# Altium PCB PCB1.PcbDoc
Units mil, origin at the board's own origin, x right, y up, seen from the top; angles counter-clockwise.
Board outline 5000 x 2185 mil, 2 copper layers (Top Layer, Bottom Layer); 67 components, 117 nets, 252 pads, 0 vias.
Unrouted connection lines stored in the file: 171.
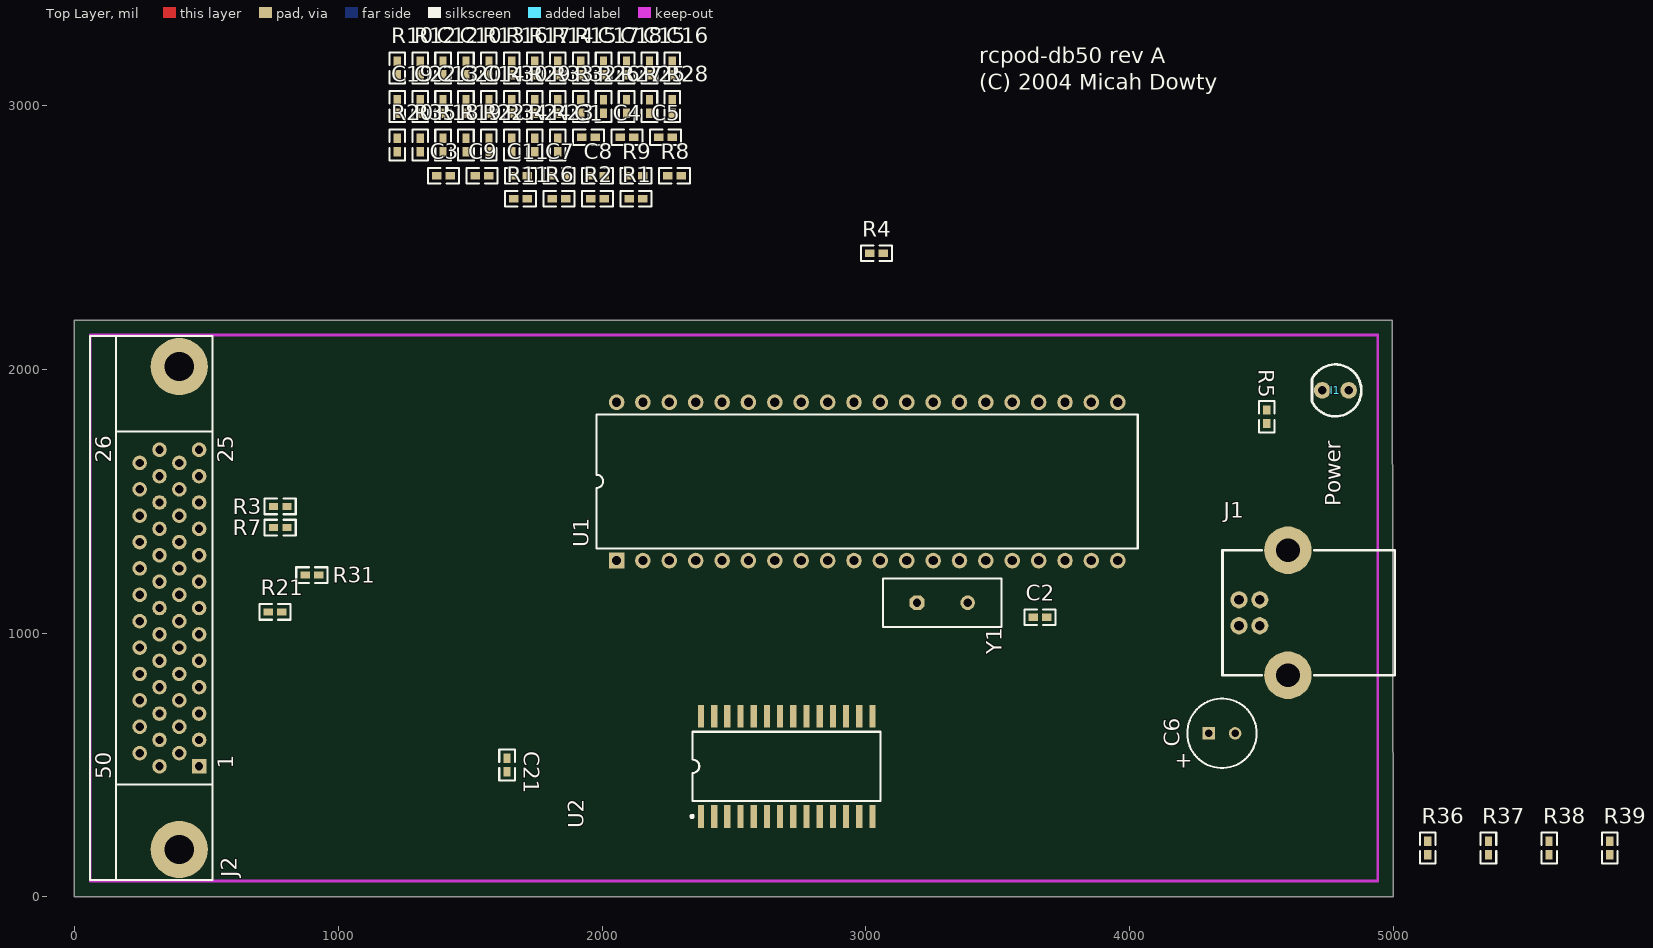
[diagram p0: Top Layer view]
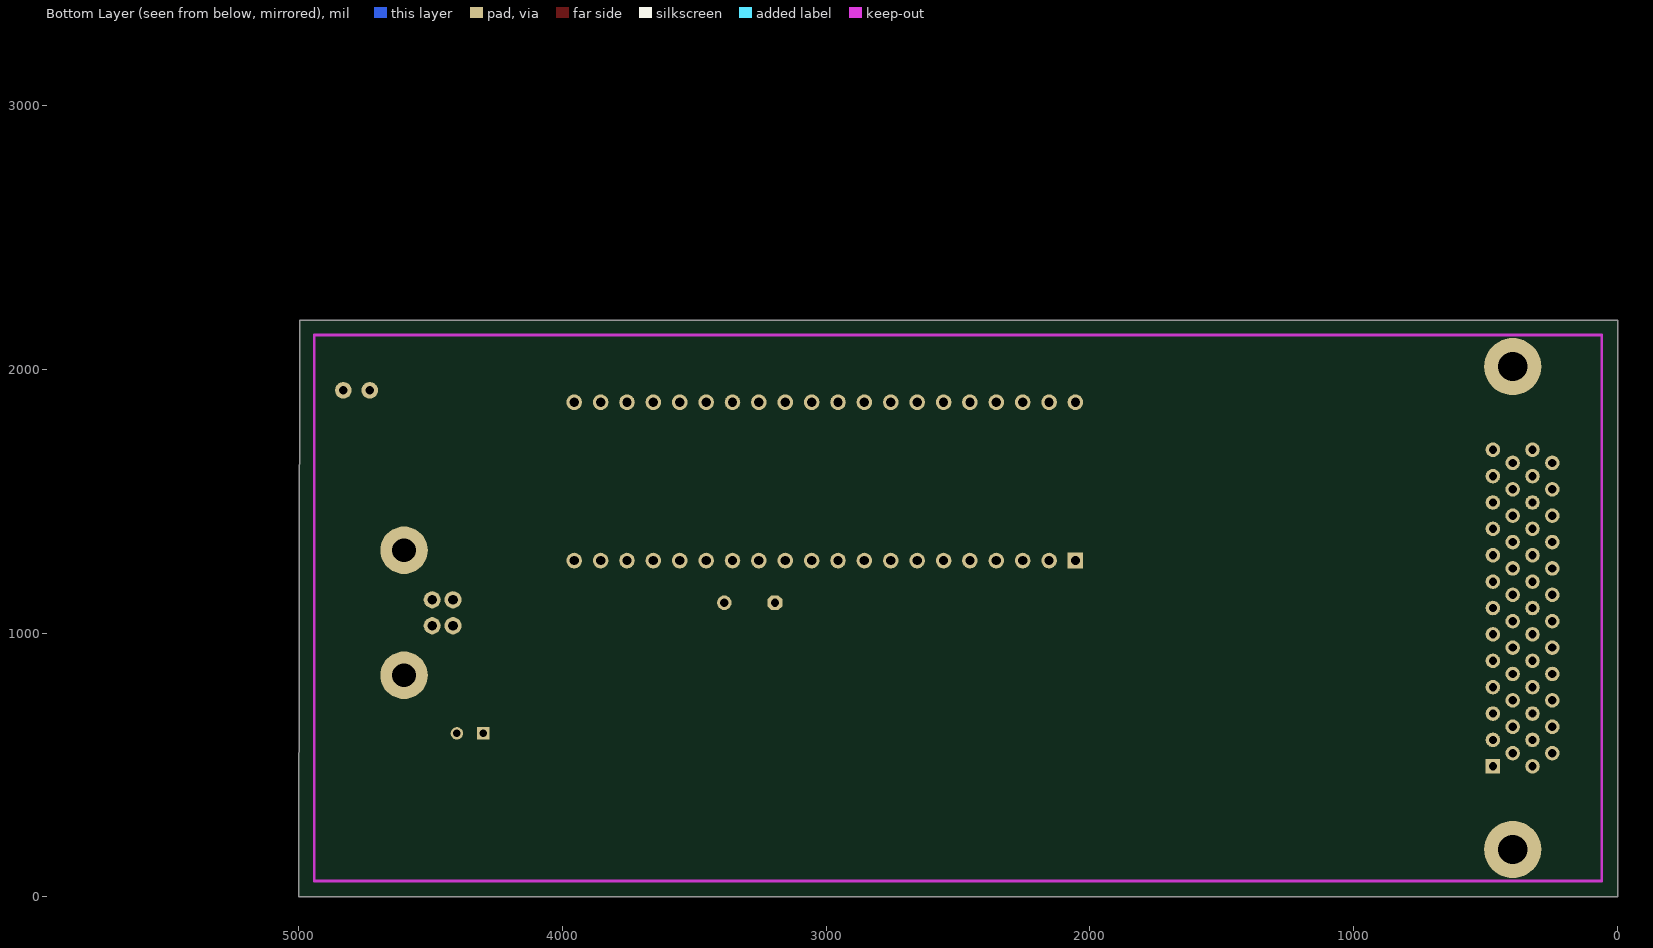
[diagram p1: Bottom Layer view, seen from below]

## Layer stack, top to bottom
Top Layer: signal copper 1.4
Dielectric: dielectric 12.6, FR-4, Dk 4.8
Bottom Layer: signal copper 1.4

## Board outline
0,0 5000,0 4995,2185 0,2185

## Design rules (kind name [scope] priority, off if disabled: settings)
Clearance [All] p1: gap=10
ComponentClearance [All] p1: gap=10 collisioncheckmode=0
PolygonConnect [All] p1: connectstyle=Relief reliefconductorwidth=10 reliefentries=4 polygonreliefangle="90 Angle"
RoomDefinition Sheet1 [InComponentClass('Sheet1')] p1: confinementstyle=ConfineIn formatcopy=TRUE outline 3940,6840 7320,6840 7320,7500 3940,7500
RoutingLayers [All] p1: top layer=Horizontal bottom layer=Vertical
RoutingVias [All] p1: holewidth=15 width=25 viastyle="Through Hole" minholewidth=15 minwidth=25 maxholewidth=15 maxwidth=25
SolderMaskExpansion [All] p1: expansion=4
TestPointUsage [All] p1: valid=0 allowmultiple=FALSE
Testpoint [All] p1: side=15 testpointundercomponent=TRUE minsize=40 maxsize=100 preferedsize=60 minholesize=0 maxholesize=40 preferedholesize=32 testpointgrid=1 style=1023 order=-539222988
Width Width_power [(InNet('VCC') or InNet('GND'))] p1: maxlimit=20 minlimit=10 preferedwidth=10 toplayer_minwidth=20 toplayer_prefwidth=20 bottomlayer_minwidth=20 bottomlayer_prefwidth=20 minimp=50.000000 maximp=50.000000 favimp=50.000000
Width [All] p2: maxlimit=10 minlimit=10 preferedwidth=10
16 further rules are at their usual default settings.

## Components (designator, comment, footprint, x,y, rotation, side; value= is the part's Value field where it differs from the comment)
C1 "Cap2" C1005-0402 1948.43,2879.57 r0 top
C2 "Cap2" C1005-0402 3660,1060 r0 top
C3 "" C1005-0402 1398.98,2733.58 r0 top
C4 "" C1005-0402 2094.41,2879.57 r0 top
C5 "" C1005-0402 2240.39,2879.57 r0 top
C6 "10uF" CAP-EE-1 4200,620 r180 top (schematic designator C4)
C7 "" C1005-0402 1836.93,2733.58 r0 top
C8 "" C1005-0402 1982.91,2733.58 r0 top
C9 "" C1005-0402 1544.96,2733.58 r0 top
C10 "" C1005-0402 1484.25,3142.01 r90 top
C11 "" C1005-0402 1690.94,2733.58 r0 top
C12 "" C1005-0402 1397.32,3142.01 r90 top
C13 "" C1005-0402 1397.32,2996.02 r90 top
C14 "" C1005-0402 1571.18,2996.02 r90 top
C15 "" C1005-0402 2179.69,3142.01 r90 top
C16 "" C1005-0402 2266.61,3142.01 r90 top
C17 "" C1005-0402 2005.83,3142.01 r90 top
C18 "" C1005-0402 2092.76,3142.01 r90 top
C19 "" C1005-0402 1223.46,2996.02 r90 top
C20 "" C1005-0402 1484.25,2996.02 r90 top
C21 "" C1005-0402 1640,500 r270 top
C22 "" C1005-0402 1310.39,2996.02 r90 top
I1 "Power" LED-1-UNBROKE 4780,1920 r270 top (schematic designator I3)
J1 "USB" USB-TYPEB 4600,840 r90 top
J2 "DB-50" CHAMP1.27-2H50-SIMPLE 60,1095 r90 top
R1 "Res1" C1005-0402 2128.9,2646.65 r0 top
R2 "" C1005-0402 1982.91,2646.65 r0 top
R3 "" C1005-0402 780,1480 r180 top
R4 "Res1" C1005-0402 3040,2440 r0 top
R5 "" C1005-0402 4520,1820 r270 top
R6 "" C1005-0402 1836.93,2646.65 r0 top
R7 "" C1005-0402 780,1400 r180 top
R8 "" C1005-0402 2274.88,2733.58 r0 top
R9 "" C1005-0402 2128.9,2733.58 r0 top
R10 "" C1005-0402 1223.46,3142.01 r90 top
R11 "" C1005-0402 1690.94,2646.65 r0 top
R12 "" C1005-0402 1310.39,3142.01 r90 top
R13 "" C1005-0402 1571.18,3142.01 r90 top
R14 "" C1005-0402 1831.97,3142.01 r90 top
R15 "" C1005-0402 1918.9,3142.01 r90 top
R16 "" C1005-0402 1658.11,3142.01 r90 top
R17 "" C1005-0402 1745.04,3142.01 r90 top
R18 "" C1005-0402 1397.32,2850.04 r90 top
R19 "" C1005-0402 1484.25,2850.04 r90 top
R20 "" C1005-0402 1223.46,2850.04 r90 top
R21 "" C1005-0402 760,1080 r0 top
R22 "" C1005-0402 1571.18,2850.04 r90 top
R23 "" C1005-0402 1831.97,2850.04 r90 top
R24 "" C1005-0402 1745.04,2850.04 r90 top
R25 "" C1005-0402 2179.69,2996.02 r90 top
R26 "" C1005-0402 2005.83,2996.02 r90 top
R27 "" C1005-0402 2092.76,2996.02 r90 top
R28 "" C1005-0402 2266.61,2996.02 r90 top
R29 "" C1005-0402 1745.04,2996.02 r90 top
R30 "" C1005-0402 1658.11,2996.02 r90 top
R31 "" C1005-0402 900,1220 r180 top
R32 "" C1005-0402 1918.9,2996.02 r90 top
R33 "" C1005-0402 1831.97,2996.02 r90 top
R34 "" C1005-0402 1658.11,2850.04 r90 top
R35 "" C1005-0402 1310.39,2850.04 r90 top
R36 "" C1005-0402 5130,185 r90 top
R37 "" C1005-0402 5360,185 r90 top
R38 "" C1005-0402 5590,185 r90 top
R39 "" C1005-0402 5820,185 r90 top
U1 "PIC16C765" DIP-40 3005,1575 r0 top
U2 "DG406 / MAX306 / MPC506" SO-G28/G7.45 2700,495 r0 top
Y1 "6 MHz" BCY-W2/E4.7 3290,1115 r0 top

## Footprints (in the part's own frame and the unit in brackets; to place one, negate y for a bottom-side part, rotate by r counter-clockwise, add the part's x,y. Pads: shape width x height; smd on the part's side, far side on the other; paste and mask are expansions set on the pad)
BCY-W2/E4.7 [mm]
  oct 1.4x1.4 hole 0.8: 1(-2.44,0)
  round 1.4 hole 0.8: 2(2.44,0)
  silkscreen extent -5.7,-2.35 5.7,2.35
C1005-0402 [mm]
  rect 0.9x0.7 smd: 1(-0.65,0) 2(0.65,0)
  silkscreen extent -1.5,-0.75 1.5,0.75
CAP-EE-1 [mm]
  rect 1.2x1.2 hole 0.7: 1(-2.54,0)
  round 1.2 hole 0.7: 2(-5.08,0)
  silkscreen extent -7.15,-3.34 -0.47,3.34
CHAMP1.27-2H50-SIMPLE [mm]
  rect 1.4x1.4 hole 0.8: 1(-15.24,-10.478)
  round 1.4 hole 0.8: 2(-13.97,-8.573) 3(-12.7,-10.478) 4(-11.43,-8.572) 5(-10.16,-10.477) 6(-8.89,-8.572) 7(-7.62,-10.477) 8(-6.35,-8.572) 9(-5.08,-10.477) 10(-3.81,-8.572) 11(-2.54,-10.477) 12(-1.27,-8.572) 13(0,-10.477) 14(1.27,-8.572) 15(2.54,-10.477) 16(3.81,-8.572) 17(5.08,-10.477) 18(6.35,-8.572) 19(7.62,-10.477) 20(8.89,-8.572) 21(10.16,-10.477) 22(11.43,-8.572) 23(12.7,-10.477) 24(13.97,-8.572) 25(15.24,-10.477) 26(15.24,-6.667) 27(13.97,-4.762) 28(12.7,-6.667) 29(11.43,-4.762) 30(10.16,-6.667) 31(8.89,-4.762) 32(7.62,-6.667) 33(6.35,-4.762) 34(5.08,-6.667) 35(3.81,-4.763) 36(2.54,-6.667) 37(1.27,-4.763) 38(0,-6.667) 39(-1.27,-4.763) 40(-2.54,-6.667) 41(-3.81,-4.763) 42(-5.08,-6.667) 43(-6.35,-4.763) 44(-7.62,-6.667) 45(-8.89,-4.763) 46(-10.16,-6.667) 47(-11.43,-4.763) 48(-12.7,-6.668) 49(-13.97,-4.763) 50(-15.24,-6.668)
  round 5.5 hole 2.8: 51(-23.25,-8.573) 52(23.25,-8.572)
  silkscreen extent -26.2,-11.78 26.2,0.02
DIP-40 [mm]
  rect 1.5x1.5 hole 0.9: 1(-24.13,-7.62)
  round 1.5 hole 0.9: 2(-21.59,-7.62) 3(-19.05,-7.62) 4(-16.51,-7.62) 5(-13.97,-7.62) 6(-11.43,-7.62) 7(-8.89,-7.62) 8(-6.35,-7.62) 9(-3.81,-7.62) 10(-1.27,-7.62) 11(1.27,-7.62) 12(3.81,-7.62) 13(6.35,-7.62) 14(8.89,-7.62) 15(11.43,-7.62) 16(13.97,-7.62) 17(16.51,-7.62) 18(19.05,-7.62) 19(21.59,-7.62) 20(24.13,-7.62) 21(24.13,7.62) 22(21.59,7.62) 23(19.05,7.62) 24(16.51,7.62) 25(13.97,7.62) 26(11.43,7.62) 27(8.89,7.62) 28(6.35,7.62) 29(3.81,7.62) 30(1.27,7.62) 31(-1.27,7.62) 32(-3.81,7.62) 33(-6.35,7.62) 34(-8.89,7.62) 35(-11.43,7.62) 36(-13.97,7.62) 37(-16.51,7.62) 38(-19.05,7.62) 39(-21.59,7.62) 40(-24.13,7.62)
  silkscreen extent -26.05,-6.45 26.05,6.45
LED-1-UNBROKE [mm]
  round 1.6 hole 0.8: 1(0,1.27) 2(0,-1.27)
  silkscreen extent -2.5,-2.27 2.5,2.5
SO-G28/G7.45 [mm]
  rect 0.6x2.2 smd: 1(-8.255,-4.825) 2(-6.985,-4.825) 3(-5.715,-4.825) 4(-4.445,-4.825) 5(-3.175,-4.825) 6(-1.905,-4.825) 7(-0.635,-4.825) 8(0.635,-4.825) 9(1.905,-4.825) 10(3.175,-4.825) 11(4.445,-4.825) 12(5.715,-4.825) 13(6.985,-4.825) 14(8.255,-4.825) 15(8.255,4.825) 16(6.985,4.825) 17(5.715,4.825) 18(4.445,4.825) 19(3.175,4.825) 20(1.905,4.825) 21(0.635,4.825) 22(-0.635,4.825) 23(-1.905,4.825) 24(-3.175,4.825) 25(-4.445,4.825) 26(-5.715,4.825) 27(-6.985,4.825) 28(-8.255,4.825)
  silkscreen extent -9.23,-4.95 9.05,3.32
USB-TYPEB [mil]
  round 65 hole 36.22: 1(286.22,185.43) 2(187.8,185.43) 3(187.8,106.69) 4(286.22,106.69)
  round 180 hole 90.55: 5(0,0) 5(474.02,0)
  silkscreen extent 0,-406 474,248

## Part data
C1 C2: "Capacitor"
C3 C4 C5 C7 C8 C9 C10 C11 C12 C13 C14 C15 C16 C17 C18 C19 C20 C21 C22: library part Cap2, "Capacitor"
C6: library part "Cap Pol1", "Polarized Capacitor (Radial)"
I1: library part LED1, "Typical RED GaAs LED"
J1: library part "USB Type B", "Header, 4-Pin"
J2: library part "Connector 50", "Receptacle Header Assemby"
R1 R4: "Resistor"
R2 R3 R5 R6 R7 R8 R9 R10 R11 R12 R13 R14 R15 R16 R17 R18 R19 R20 R21 R22 R23 R24 R25 R26 R27 R28 R29 R30 R31 R32 R33 R34 R35 R36 R37 R38 R39: library part Res1, "Resistor"
U1: "EPROM-Based 8-Bit CMOS Microcontroller with USB"
U2: library part MAX306EPI, "Precision, 16-Channel High-performance, CMOS Analog Multiplexer"
Y1: library part XTAL, "Crystal Oscillator"

## Nets (pads, with @x,y where several pads share a name; then routed paths per layer and width w, separated by ;. In a path a pad name is that pad's centre, name@x,y a point inside that pad or via, vN(x,y) a via of type N, cw(c..) or ccw(c..) an arc to the next point about the centre after c; other vN are vias at no path point)
GND: C1.1 C2.1 C3.1 C4.1 C5.1 C6.2 C7.1 C8.1 C9.1 C10.1 C11.1 C12.1 C13.1 C14.1 C15.1 C16.1 C17.1 C18.1 C19.1 C20.1 C21.1 C22.1 J1.4 J1.5 J2.1 J2.51 J2.52 R5.2 R20.2 R21.2 R22.2 R23.2 R24.2 R25.2 R26.2 R27.2 R28.2 R29.2 R30.2 R31.2 R32.2 R33.2 R34.2 R35.2 R36.1 R37.1 R38.1 R39.1 U1.12 U1.31 U2.12 U2.27
NetC1_2: C1.2 U1.13 Y1.1
NetC2_2: C2.2 U1.14 Y1.2
NetC3_2: C3.2 R4.1 U1.18
NetC7_2: C7.2 R2.1 U2.19
NetC8_2: C8.2 R3.1 U2.20
NetC9_2: C9.2 R6.1 U2.21
NetC10_2: C10.2 R7.1 U2.22
NetC11_2: C11.2 R8.1 U2.23
NetC12_2: C12.2 R9.1 U2.24
NetC13_2: C13.2 R10.1 U2.25
NetC14_2: C14.2 R11.1 U2.26
NetC15_2: C15.2 R12.1 U2.11
NetC16_2: C16.2 R13.1 U2.10
NetC17_2: C17.2 R14.1 U2.9
NetC18_2: C18.2 R15.1 U2.8
NetC19_2: C19.2 R16.1 U2.7
NetC20_2: C20.2 R17.1 U2.6
NetC21_2: C21.2 R18.1 U2.5
NetC22_2: C22.2 R19.1 U2.4
NetI1_1: 
NetI1_2: I1.2 R5.1
NetI3_1: 
NetJ1_2: J1.2 R4.2 U1.23
NetJ1_3: J1.3 U1.24
NetJ2_1: 
NetJ2_2: 
NetJ2_3: 
NetJ2_4: 
NetJ2_5: 
NetJ2_6: 
NetJ2_7: 
NetJ2_8: 
NetJ2_9: 
NetJ2_10: 
NetJ2_11: 
NetJ2_12: 
NetJ2_13: 
NetJ2_14: 
NetJ2_15: 
NetJ2_16: 
NetJ2_17: 
NetJ2_18: 
NetJ2_19: 
NetJ2_20: 
NetJ2_21: 
NetJ2_22: 
NetJ2_23: 
NetJ2_24: 
NetJ2_25: 
NetJ2_26: 
NetJ2_27: 
NetJ2_28: 
NetJ2_29: 
NetJ2_30: 
NetJ2_31: 
NetJ2_32: 
NetJ2_33: 
NetJ2_34: 
NetJ2_35: 
NetJ2_36: 
NetJ2_37: 
NetJ2_38: 
NetJ2_39: 
NetJ2_40: 
NetJ2_41: 
NetJ2_42: 
NetJ2_43: 
NetJ2_44: 
NetR1_1: R1.1 U1.1
NetR36_2: R36.2 U1.19 U2.17
NetR37_2: R37.2 U1.20 U2.16
NetR38_2: R38.2 U1.21 U2.15
NetR39_2: R39.2 U1.22 U2.14
NetU1_2: U1.2 U2.28
PIN3: J2.3 U1.3
PIN4: J2.4 U1.4
PIN5: J2.5 U1.5
PIN6: J2.6 U1.6
PIN7: J2.7 U1.7
PIN8: J2.8 U1.8
PIN9: J2.9 U1.9
PIN10: J2.10 U1.10
PIN11: J2.11 U1.33
PIN12: J2.12 U1.34
PIN13: J2.13 U1.35
PIN14: J2.14 U1.36
PIN15: J2.15 U1.37
PIN16: J2.16 U1.38
PIN17: J2.17 U1.39
PIN18: J2.18 U1.40
PIN19: J2.19 U1.15
PIN20: J2.20 U1.16
PIN21: J2.21 U1.17
PIN22: J2.22 U1.25
PIN23: J2.23 U1.26
PIN24: J2.24 U1.27
PIN25: J2.25 U1.28
PIN26: J2.26 U1.29
PIN27: J2.27 U1.30
PIN28: J2.28 R2.2 R20.1
PIN29: J2.29 R3.2 R21.1
PIN30: J2.30 R6.2 R22.1
PIN31: J2.31 R7.2 R23.1
PIN32: J2.32 R8.2 R24.1
PIN33: J2.33 R9.2 R25.1
PIN34: J2.34 R10.2 R26.1
PIN35: J2.35 R11.2 R27.1
PIN36: J2.36 R12.2 R28.1
PIN37: J2.37 R13.2 R29.1
PIN38: J2.38 R14.2 R30.1
PIN39: J2.39 R15.2 R31.1
PIN40: J2.40 R16.2 R32.1
PIN41: J2.41 R17.2 R33.1
PIN42: J2.42 R18.2 R34.1
PIN43: J2.43 R19.2 R35.1
VCC: C4.2 C5.2 C6.1 I1.1 J1.1 J2.2 R1.2 U1.11 U1.32 U2.1 U2.18
pads on no net: J2.44 J2.45 J2.46 J2.47 J2.48 J2.49 J2.50 U2.2 U2.3 U2.13

## Keep-outs
Keep-Out Layer:
  lines w10: 60,60 4940,60 4940,2130 60,2130 60,60

## Silkscreen, mask and mechanical layers (free items; w line width, h text height)
Top Overlay:
  text "rcpod-db50 rev A" at 3430,3160 h60
  text "(C) 2004 Micah Dowty" at 3430,3060 h60
Mechanical 1:
  lines w10: 0,0 5000,0 5000,2185 0,2185 0,0

## Text inside footprints (layer, text, board x,y; h text height)
C6: Top Overlay "+" at 4240,540 h59.06 r180
J2: Top Overlay "26" at 138.84,1645.79 h59.06 r90; Top Overlay "50" at 138.84,445.79 h59.06 r90; Top Overlay "25" at 601.44,1645.79 h59.06 r90; Top Overlay "1" at 601.44,485.16 h59.06 r90